# Altium PCB AB1000_RB_V6_fin.PcbDoc
Units mm, origin at the board's own origin, x right, y up, seen from the top; angles counter-clockwise.
Board outline 58.5 x 26.6 mm, 2 copper layers (Top Layer, Bottom Layer), stack 1.581 mm thick; 51 components, 40 nets, 148 pads, 114 vias.
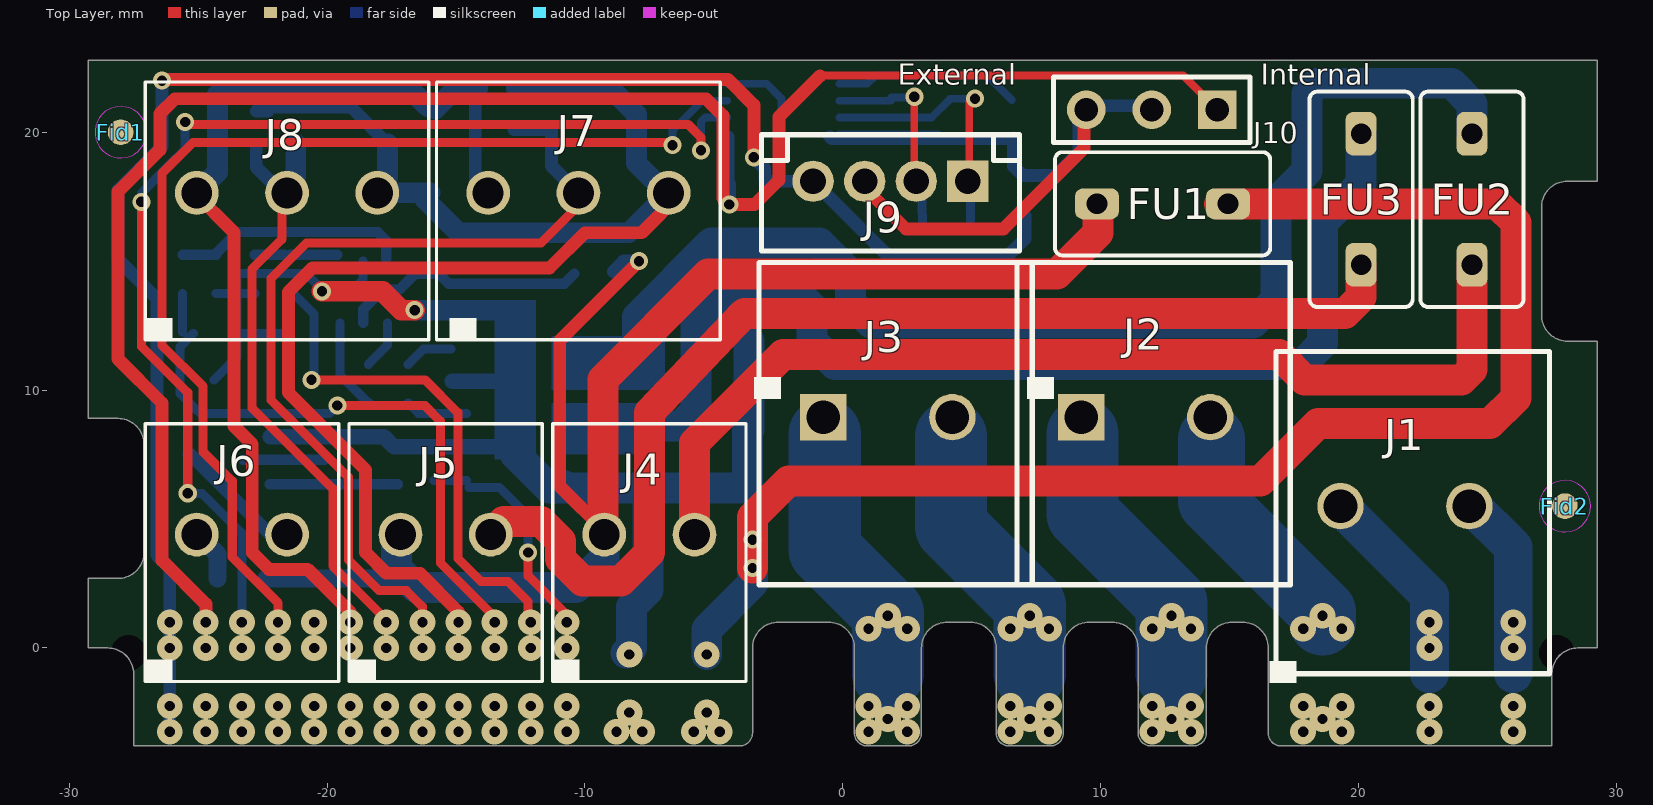
[diagram p0: Top Layer view]
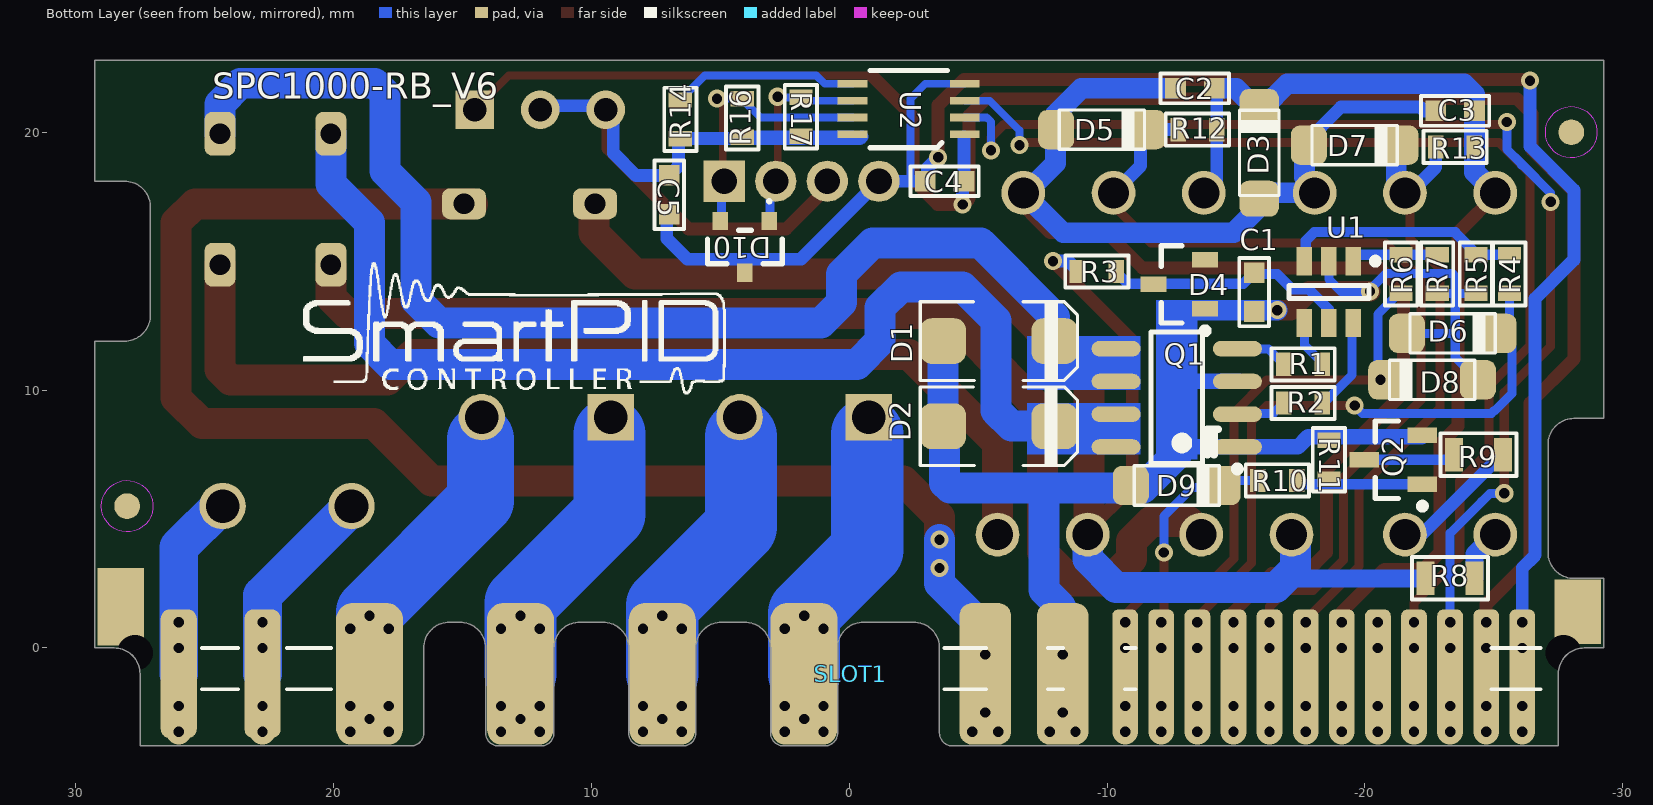
[diagram p1: Bottom Layer view, seen from below]

## Layer stack, top to bottom
Top Solder: solder mask 0.0102, Solder Resist, Dk 3.5
Top Layer: signal copper 0.0356
Dielectric 1: dielectric 1.51, FR-4, Dk 4.8
Bottom Layer: signal copper 0.0356
Bottom Solder: solder mask 0.0102, Solder Resist, Dk 3.5

## Board outline
-27.5,-3.8 -4,-3.8 ccw(c-4,-3.3) -3.5,-3.3 -3.5,0 cw(c-2.5,0) -2.5,1 -0.55,1 cw(c-0.55,0) 0.45,0 0.45,-3.3 ccw(c0.95,-3.3) 0.95,-3.8 2.55,-3.8 ccw(c2.55,-3.3) 3.05,-3.3 3.05,0 cw(c4.05,0) 4.05,1 4.95,1 cw(c4.95,0) 5.95,0 5.95,-3.3 ccw(c6.45,-3.3) 6.45,-3.8 8.05,-3.8 ccw(c8.05,-3.3) 8.55,-3.3 8.55,0 cw(c9.55,0) 9.55,1 10.45,1 cw(c10.45,0) 11.45,0 11.45,-3.3 ccw(c11.95,-3.3) 11.95,-3.8 13.6,-3.8 ccw(c13.6,-3.3) 14.1,-3.3 14.1,0 cw(c15.1,0) 15.1,1 15.5,1 cw(c15.5,0) 16.5,0 16.5,-3.3 ccw(c17,-3.3) 17,-3.8 27.5,-3.8 27.5,-1 cw(c28.5,-1) 28.5,0 29.25,0 29.25,11.9 28.1,11.9 cw(c28.1,12.9) 27.1,12.9 27.1,17.1 cw(c28.1,17.1) 28.1,18.1 29.25,18.1 29.25,22.8 -29.25,22.8 -29.25,8.9 -28.1,8.9 cw(c-28.1,7.9) -27.1,7.9 -27.1,3.7 cw(c-28.1,3.7) -28.1,2.7 -29.25,2.7 -29.25,0 -28.5,0 cw(c-28.5,-1) -27.5,-1

## Design rules (kind name [scope] priority, off if disabled: settings)
Clearance [All] p1: gap=0.25
ComponentClearance ComponentClearance_1 [All vs InComponent('SLOT1') or InComponent('J1','J2','Fid1')] p1: gap=0 collisioncheckmode=3 verticalgap=0 showdistances=TRUE
ComponentClearance [All] p2: gap=0.254 collisioncheckmode=3 verticalgap=0.254 showdistances=FALSE
PolygonConnect [All] p1: connectstyle=Relief reliefconductorwidth=0.254 reliefentries=4 polygonreliefangle="90 Angle" airgapwidth=0.254
RoomDefinition AB1000_RB_V6_fin [InComponentClass('AB1000_RB_V6_fin')] p1: confinementstyle=ConfineIn formatcopy=TRUE lockcomponents=FALSE outline -82.245,-52.527 -31.445,-52.527 -31.445,-27.127 -82.245,-27.127
RoutingVias [All] p1: holewidth=0.5 width=0.8 viastyle="Through Hole" minholewidth=0.4 minwidth=0.7 maxholewidth=0.8 maxwidth=1.5
SolderMaskExpansion [All] p1: expansion=0.102
Width [All] p1: maxlimit=5 minlimit=0.3 preferedwidth=0.5
29 further rules are at their usual default settings.

## Components (designator, comment, footprint, x,y, rotation, side; value= is the part's Value field where it differs from the comment)
C1 "10uF 6.3V" C0603_IR -15.7,13.8 r270 bottom
C2 "1uF" C0603_IR -13.4,21.7 r0 bottom
C3 "1uF" C0603_IR -23.495,20.828 r0 bottom
C4 "0.1uF" C0603_IR -3.7,18.1 r180 bottom
C5 "0.1uF" C0603_IR 6.975,17.575 r270 bottom
D1 "1SMA5920BT3" "DO-214AC (SMA)" -5.8,11.9 r180 bottom
D2 "1SMA5920BT3" "DO-214AC (SMA)" -5.8,8.6 r180 bottom
D3 "3.3V" SOD80/MLL34 -15.9,19.2 r90 bottom
D4 "BZX84-C5V1" SOT23_L -12.8,14.1 r0 bottom
D5 "5.5V" SOD80/MLL34 -9.8,20.1 r180 bottom
D6 "3.3V" SOD80/MLL34 -23.4,12.2 r180 bottom
D7 "5.5V" SOD80/MLL34 -19.6,19.5 r180 bottom
D8 "3.3V" SOD80/MLL34 -22.6,10.4 r0 bottom
D9 "3.3V" SOD80/MLL34 -12.7,6.3 r180 bottom
D10 "BAT54A" NXP-SOT23-3_V 4.05,15.55 r180 bottom
Fid1 "Fiducial mark" Fiducial -28,20 r90 top
Fid2 "Fiducial mark" Fiducial 28,5.5 r90 top
FU1 "Fuse 2A" fuseRFTQ 12.4,17.225 r270 top
FU2 "Fuse 2A" fuseRFTQ 24.4,17.4 r0 top
FU3 "Fuse 2A" fuseRFTQ 20.1,17.4 r0 top
J1 "691201720002S" 691201720002S#1 21.8,5.5 r0 top
J2 "691201720002S" 691201720002S#2 11.75,8.95 r0 top
J3 "691201720002S" 691201720002S#2 1.75,8.95 r0 top
J4 "691221120002" 691221120002 -7.5,4.4 r0 top
J5 "691221120002" 691221120002 -15.4,4.4 r0 top
J6 "691221120002" 691221120002 -23.3,4.4 r0 top
J7 "691221120003" 691221120003 -10.25,17.65 r0 top
J8 "691221120003" 691221120003 -21.55,17.65 r0 top
J9 "B4B-PH" CON4_P2.0 1.85,18.1 r180 top
J10 "Header 3" HDR1X3 14.525,20.875 r180 top
Q1 "IRF7313" 8S1_L -12.7,9.7 r0 bottom
Q2 "BC817-40" SOT-23A_N -21.1,7.3 r0 bottom
R1 "10" R0603_IR -17.6,11 r0 bottom
R2 "10" R0603_IR -17.6,9.5 r0 bottom
R3 "1k" R0603_IR -9.6,14.6 r180 bottom
R4 "1k" R0603_IR -25.6,14.5 r270 bottom
R5 "51k" R0603_IR -24.3,14.5 r90 bottom
R6 "1k" R0603_IR -21.4,14.5 r270 bottom
R7 "51k" R0603_IR -22.8,14.5 r90 bottom
R8 "33" R0805_IR -23.3,2.7 r180 bottom
R9 "33" R0805_IR -24.4,7.5 r180 bottom
R10 "5k1 1%" R0603_IR -16.6,6.5 r0 bottom
R11 "51k" R0603_IR -18.6,7.3 r270 bottom
R12 "5k1 1%" R0603_IR -13.5,20.1 r180 bottom
R13 "5k1 1%" R0603_IR -23.495,19.431 r180 bottom
R14 "10k" R0603_IR 6.55,20.5 r90 bottom
R16 "1K" R0603_IR 4.15,20.55 r90 bottom
R17 "1K" R0603_IR 1.875,20.6 r270 bottom
SLOT1 "slot_rear_panel_1" REAR_PANEL_MAIN_SLOT_NCOv2 0,0 r0 top locked
U1 "74LVC2G34" SC70(SOT23-6) -18.6,13.8 r90 bottom
U2 "P82B96DGKR" TSSOP-8_P0.65MM_3.1X3.1MM -2.3,20.9 r0 bottom

## Footprints (in the part's own frame and the unit in brackets; to place one, negate y for a bottom-side part, rotate by r counter-clockwise, add the part's x,y. Pads: shape width x height; smd on the part's side, far side on the other; paste and mask are expansions set on the pad)
8S1_L [mm] "SOIC, 8-Leads, Body 4.9x3.9mm, Pitch 1.27mm, IPC High Density"
  oval 1.9x0.6 smd: 1(-2.35,1.905) 2(-2.35,0.635) 3(-2.35,-0.635) 4(-2.35,-1.905) 5(2.35,-1.905) 6(2.35,-0.635) 7(2.35,0.635) 8(2.35,1.905)
  silkscreen extent -2.47,-2.55 1,2.88, body extent -2.92,-2.45 2.86,2.45, height 1.45
691201720002S#1 [mm] "Serie 201S - 5.00 mm _ 2 pins"
  round 1.8 hole 1.3: 1(-2.5,0) 2(2.5,0)
  silkscreen extent -5,-6.5 5.6,6, body extent -5,-6.55 5.6,5.95, height 12.1
691201720002S#2 [mm] "Serie 201S - 5.00 mm _ 2 pins"
  rect 1.8x1.8 hole 1.3: 1(-2.5,0)
  round 1.8 hole 1.3: 2(2.5,0)
  silkscreen extent -5,-6.5 5.6,6, body extent -5,-6.55 5.6,5.95, height 12.1
691221120002 [mm] "3,50mm - modular - green - 55° wire entry - Cage clamp - 02p"
  round 1.7 hole 1.2: 1(-1.75,0) 2(1.75,0)
  silkscreen extent -3.75,-5.7 3.75,4.3, body extent -3.75,-5.7 3.75,4.3, height 9.51
691221120003 [mm] "3,50mm - modular - green - 55° wire entry - Cage clamp - 03p"
  round 1.7 hole 1.2: 1(-3.5,0) 2(0,0) 3(3.5,0)
  silkscreen extent -5.5,-5.7 5.5,4.3, body extent -5.5,-5.7 5.5,4.3, height 9.51
C0603_IR [mm]
  rect 0.8x0.8 smd: 1(0.75,0) 2(-0.75,0)
  silkscreen extent -1.33,-0.58 1.33,0.58, body extent -0.8,-0.4 0.8,0.4, height 0.8
CON4_P2.0 [mm] "JST connector"
  rect 1.6x1.6 hole 1: 1(-3,0)
  round 1.6 hole 1: 2(-1,0) 3(1,0) 4(3,0)
  silkscreen extent -5,-1.8 5,2.7, body extent -4.95,-1.74 4.95,2.76, height 6
"DO-214AC (SMA)" [mil] "DO-214-AC/SMA; 2 C-Bend Leads; Body 5 x 2.7 mm, inc. leads (LxW)"
  rrect50% 70x70 smd: 1(-85,0) 2(85,0)
  silkscreen extent -120,-60 120,60, body extent -98,-53 98,53, height 85
Fiducial [mm]
  round 1 smd far side paste-10 mask+0.5: 0(0,0)
  round 1 smd paste-10 mask+0.5: 0(0,0)
  Keep-Out Layer circle w0.01: c0,0 r1
fuseRFTQ [mm]
  rrect50% 1.2x1.7 hole 0.8: 1(0,-2.54) 2(0,2.54)
  silkscreen extent -2,-4.18 2,4.18, body extent -2,-4.17 2,4.18, height 7.7
HDR1X3 [mm] "Connector; Header; 3 Position"
  rect 1.5x1.5 hole 0.9: 1(0,0)
  round 1.5 hole 0.9: 2(2.54,0) 3(5.08,0)
  silkscreen extent -1.27,-1.27 6.35,1.27, body extent -1.24,-1.2 6.38,1.34, height 8.55
NXP-SOT23-3_V [mm] "SOT23, 3-Leads, Body 1.3x2.9mm, Pitch 0.95mm"
  rect 0.6x0.7 smd paste-0.05: 1(0.95,1) 2(-0.95,1) 3(0,-1)
  silkscreen extent -1.45,-0.65 1.45,1.79, body extent -1.45,-0.65 1.45,0.65, height 1.1
R0603_IR [mm]
  rect 0.6x0.9 smd: 1(0.75,0) 2(-0.75,0)
  silkscreen extent -1.22,-0.63 1.22,0.63, body extent -0.8,-0.4 0.8,0.4, height 0.4
R0805_IR [mm]
  rect 0.7x1.3 smd: 1(0.95,0) 2(-0.95,0)
  silkscreen extent -1.48,-0.82 1.48,0.82, body extent -1,-0.62 1,0.63, height 0.5
REAR_PANEL_MAIN_SLOT_NCOv2 [mm]
  rrect50% 1x5 smd far side paste-3: 1(-24.7,-1) 2(-23.3,-1) 3(-21.9,-1) 4(-20.5,-1) 5(-19.1,-1) 6(-17.7,-1) 7(-16.3,-1) 8(-14.9,-1) 9(-13.5,-1) 10(-12.1,-1) 11(-10.7,-1) R(-26.1,-1)
  rrect50% 2x5.5 smd far side paste-3: 12(-8.275,-1) 13(-5.275,-1)
  rrect50% 2.6x5.5 smd far side paste-3: 14(1.75,-1) 15(7.25,-1) 16(12.75,-1) 17(18.6,-1)
  rrect50% 1.4x5 smd far side paste-3: 18(22.75,-1) 19(26,-1)
  body extent -26.6,-3.7 26.7,1.7, height 0.1
SC70(SOT23-6) [mm] "SOT-23, 6-Leads, Body 2.90x1.60mm, Pitch 0.95mm, IPC Medium Density"
  rect 1.1x0.6 smd: 1(1.2,-0.95) 2(1.2,0) 3(1.2,0.95) 4(-1.2,0.95) 5(-1.2,0) 6(-1.2,-0.95)
  silkscreen extent -0.25,-1.92 1.32,1.55, body extent -1.42,-1.46 1.42,1.46, height 1.1
SOD80/MLL34 [mil]
  rrect50% 55x60 smd: 1(-70,0) 2(70,0)
  silkscreen extent -65,-30 65,30, body extent -69,-28 69,27, height 55
SOT23_L [mm] "SOT23, 3-Leads, Body 2.9x1.3mm, Pitch 0.95mm, Lead Span 2.3mm, IPC High Density"
  rect 1x0.6 smd: 1(-1,0.95) 2(-1,-0.95) 3(1,0)
  silkscreen extent -1.12,-1.5 0.7,1.92, body extent -0.7,-1.5 0.7,1.5, height 1.1
SOT-23A_N [mm] "SOT23, 3-Leads, Body 2.9x1.3mm, Pitch 0.95mm, Lead Span 2.3mm, IPC Medium Density"
  rect 1.15x0.6 smd: 1(-1.125,0.95) 2(-1.125,-0.95) 3(1.125,0)
  silkscreen extent -1.25,-1.5 0.7,1.92, body extent -0.7,-1.5 0.7,1.5, height 1.09
TSSOP-8_P0.65MM_3.1X3.1MM [mm]
  rect 1.15x0.3 smd: 1(-2.175,0.975) 2(-2.175,0.325) 3(-2.175,-0.325) 4(-2.175,-0.975) 5(2.175,-0.975) 6(2.175,-0.325) 7(2.175,0.325) 8(2.175,0.975)
  silkscreen extent -1.5,-1.5 1.5,1.5, body extent -2.5,-1.55 2.5,1.55, height 1.11

## Part data
C1 C2 C3 C4 C5: library part CapSMD, "Capacitor"
D1 D2: library part 1SMA59xxBT3, "SMD-SMA 1.5W"
D3 D5 D6 D7 D8 D9: library part BZV55-SMD, "BZV55 SMD-SOD80C  0.5W"
D4: library part BZX84-C11, "Voltage Regulator Diode"
D10: library part CMP-0417-00002-1, "Schottky Barrier Diode, 30 V, 2 uA, -55 to 150 degC, 3-Pin SOT23, RoHS, Tape and Reel"
Fid1 Fid2: library part Fiducial, "Fiducial Mark"
FU1 FU2 FU3: library part "FUSE- RFTQ", "5mm 15A"
J1: "45deg Cable Entry with Rising Cage Clamp, Serie 201S - 5.00 mm"
J2 J3: "45deg  Cable Entry with Rising Cage Clamp, Serie 201S - 5.00 mm"
J4 J5 J6 J7 J8: "WR-TBL Terminal Blocks Serie 2211 - 3.50 mm"
J9: "4 Positions Header, Shrouded Connector 0.079\" (2.00mm) Through Hole Tin"
J10: "Header, 3-Pin"
Q1: "HEXFET Power MOSFET"
Q2: "NPN General Purpose Amplifier"
R1 R2 R3 R4 R5 R6 R7 R8 R9 R10 R11 R12 R13 R14: library part ResSMD, "Resistor"
R16 R17: library part R_SMD, "Resistor"
U1: "Triple Non-inverters"
U2: library part CMP-0314-00301-2, "Dual Bidirectional Bus Buffer, 2 Channel Width, 2.0 to 15.0 V, -40 to 85 degC, 8-pin MSOP (DGK), Green (RoHS & no Sb/Br)"

## Free pads (board coordinates)
  round 0.2 hole 1.4 unplated paste-3 mask-3: cu14(-27.7,-0.2) cu14(27.7,-0.2)
  rect 1.8x2.5 smd far side paste-3: SM(-28.25,1.4)
  rect 1.8x3 smd far side paste-3: SM(28.25,1.6)

## Via types
v1: diameter 1, hole 0.4, Top Layer to Bottom Layer, tented both sides, 96 vias
v2: diameter 0.7, hole 0.4, Top Layer to Bottom Layer, tented both sides, 18 vias

## Nets (pads, with @x,y where several pads share a name; then routed paths per layer and width w, separated by ;. In a path a pad name is that pad's centre, name@x,y a point inside that pad or via, vN(x,y) a via of type N, cw(c..) or ccw(c..) an arc to the next point about the centre after c; other vN are vias at no path point)
12V: FU1.2 SLOT1.13 | length 57.3
  Top Layer w1.2: v2(-3.5,3.1) v2(-3.5,4.2) -3.5,5.075 -2.1,6.475 16.2,6.475 18.425,8.7 25.1,8.7 26.1,9.7 26.1,16.5 25.375,17.225 FU1.2@14.6,17.225
  Bottom Layer w1.2: v1(-5.275,-0.25) -5.275,0.725 -3.5,2.5 v2(-3.5,3.1) v2(-3.5,4.2)
  other v1: -5.775,-3.25 -4.775,-3.25 -5.275,-2.5
AC1: J1.1 SLOT1.18 | length 8
  Bottom Layer w1.5: J1.1@19.3,5.6 J1.1 22.75,2.05 SLOT1.18
  other v1: 22.75,-3.25 22.75,-2.25 22.75,0 22.75,1
AC2: J1.2 SLOT1.19 | length 7.3
  Bottom Layer w1.5: J1.2@24.3,5.6 26,3.9 SLOT1.19
  other v1: 26,-3.25 26,-2.25 26,0 26,1
CFET1: D1.2 FU2.2 Q1.5 Q1.6 | length 45.6
  Bottom Layer w1.2: D1.2 -7.959,12.841 -5.1,15.7 -0.9,15.7 0.3,14.5 0.3,13.4 1.1,12.6 15.9,12.6 16.8,13.5 16.8,17.1 ; 16.8,17.3 18,18.5 18,21.5 18.4,21.9 23.6,21.9 24.4,21.1 FU2.2 FU2.2@24.4,19.9
CFET2: D2.2 FU3.2 Q1.7 Q1.8 | length 42
  Bottom Layer w1.2: D2.2 -6.3,8.6 -5.7,9.2 -5.7,12.7 -4.4,14 -2,14 -1.2,13.2 -1.2,11.9 -0.3,11 17.8,11 18.6,11.8 18.6,16.5 20.1,18 FU3.2@20.1,20
D33V: C4.1 J10.1 SLOT1.1 U2.1 | length 73.4
  Top Layer w0.3: -0.85,22.2 13.2,22.2 J10.1@14.5,20.9
  Top Layer w0.5: v1(-24.7,1) -24.7,1.7 -26.4,3.4 -26.4,9.5 -28.1,11.2 -28.1,17.7 -26.482,19.318 -26.482,20.716 -25.898,21.3 -5.3,21.3 -4.65,20.65 -4.65,17.425 v2@-4.425,17.2 ; v2(-4.4,17.2) -3.425,17.2 -2.475,18.15 -2.475,20.6 -0.887,22.187 ; J10.1@14.337,20.613 J10.1@14.45,20.5
  Bottom Layer w0.5: C4.1@-4.475,18.075 -4.4,18 v2(-4.4,17.2) ; C4.1 U2.1@-4.45,19.825
  other v1: -24.7,-3.25 -24.7,-2.25 -24.7,0
F12V: FU1.1 J4.1 J5.1 R3.2 R8.2 | length 58.6
  Top Layer w0.5: J4.1@-9.2,4.4 -9.2,4.5 -10.975,6.275 -10.975,11.925 v2(-7.9,15)
  Top Layer w1.2: J4.1@-9.2,4.3 -9.25,4.35 J4.1 -9.2,4.4 -9.3,4.5 -9.3,10.419 -5.219,14.5 8.3,14.5 9.9,16.1 FU1.1@9.9,16.7
  Bottom Layer w0.5: R3.2@-8.9,14.6 -8.5,15 v2(-7.9,15)
  Bottom Layer w0.7: R8.2 -17.2,2.7 -17.05,2.85 -17,2.9
  Bottom Layer w1.2: J5.1@-17.3,4.3 -17.3,3.1 -17.05,2.85 -16.55,2.35 -10.35,2.35 -9.25,3.45 J4.1
GND: C1.1 D1.1 D2.1 D4.1 D6.1 D8.1 D9.1 Q1.1 Q1.3 Q2.2 R5.2 R7.2 R11.2 SLOT1.12 U1.2 | length 59
  Top Layer w0.8: v2(-20.193,13.828) -17.841,13.828 -17.113,13.1 v2(-16.6,13.1)
  Bottom Layer w0.35: D8.1 -23.5,11.278 -23.5,12.3 ; R5.2 -23.5,13.75 ; R7.2 -23.5,13.75 ; D6.1 -23.4,12.2 -23.5,12.3 ; v2@-20.2,13.8 -19.1,13.8 -18.6,14.3 U1.2 ; v2(-20.193,13.828) -20.193,13.894 -20.824,14.525 -22.026,14.525 -23.375,14.525 -23.5,14.4 -23.5,13.75 ; -23.5,12.3 -23.5,13.75
  Bottom Layer w0.6: Q2.2@-22.2,8.2 -17.8,8.2 -17.4,7.8 -16.4,7.8 ; -16.4,7.795 Q1.1 -12.7,7.795 -12.595,7.795 ; Q1.3@-15.15,10.335 Q1.3 -12.835,10.335
  Bottom Layer w0.8: v2(-16.6,13.1) -16.4,13.1 -16.407,13.093 -13.193,13.093 -12.6,12.5 -12.6,10.9
  Bottom Layer w1.2: -12.7,8.5 -12.7,7.795 -12.7,7.5 -11.4,6.2 D9.1@-10.922,6.2 ; D9.1@-10.822,6.3 D9.1@-10.922,6.2 ; SLOT1.12@-8.4,-0.2 -8.2,0 -8.2,1.6 -7.55,2.25 -7.55,6.093 -7.657,6.2 ; D2.1@-3.7,8.6 -3.7,6.4 -3.9,6.2 -7.657,6.2 ; D2.1@-3.641,8.459 D2.1 D1.1 ; D9.1@-10.922,6.2 -7.657,6.2
  other v1: -8.775,-3.25 -7.775,-3.25 -8.275,-2.5 -8.275,-0.25
GND_D33V: C4.2 C5.1 D10.3 J9.4 SLOT1.R U2.4 | length 71.3
  Top Layer w0.5: v2(-26.4,22) -26.35,22.05 -4.45,22.05 -3.45,21.05 v2@-3.45,19.05
  Bottom Layer w0.3: U2.4 -2.95,21.875 -2.375,21.3 -2.375,18.1
  Bottom Layer w0.5: v2@-26.4,21.7 -26.4,19.453 -28.1,17.753 -28.1,15.05 -26.6,13.55 -26.6,3.6 -26.1,3.1 v1(-26.1,1) v1(-26.1,0) SLOT1.R v1(-26.1,-2.25) v1(-26.1,-3.25) ; v2(-3.45,19.025) -3.025,18.6 -3.025,18.175 C4.2 -2.375,18.1 J9.4@-1.375,18.1 ; J9.4 1.875,15.075 4.05,15.075 ; D10.3 4.05,15.075 ; C5.1@7.075,16.75 7.075,15.875 6.275,15.075 4.05,15.075
GROVE_SCK: SLOT1.2 U2.2 | length 45.3
  Top Layer w0.35: v2@-27.2,17.445 v2(-27.2,17.3) -27.2,11.7 -25.4,9.9 v2(-25.4,6) ; v2(-25.5,20.4) -25.4,20.3 -6,20.3 -5.5,19.8 v2(-5.5,19.3)
  Bottom Layer w0.3: v2(-5.5,19.3) -5.5,20.4 -5.325,20.575 U2.2
  Bottom Layer w0.35: v2(-27.2,17.3) -27.2,17.643 -26.075,18.768 ; -26.075,18.725 -26.075,18.768 ; v2@-25.5,6 v2(-25.4,6) -24.855,6 -24.53,5.675 -24.522,5.675 -23.3,4.453 v1(-23.3,1) ; v2(-25.5,20.4) -25.5,19.343 -26.075,18.768
  other v1: -23.3,-3.25 -23.3,-2.25 -23.3,0
GROVE_SDA: SLOT1.3 U2.3 | length 42.8
  Top Layer w0.35: v1(-21.9,1) -21.9,1.745 -23.675,3.52 -23.675,6.475 -24.8,7.6 -24.8,10.149 -26.4,11.749 -26.4,18.4 -25.2,19.6 -6.7,19.6 v2(-6.6,19.5)
  Bottom Layer w0.3: v2(-6.6,19.5) -6.6,20.078 -5.453,21.225 U2.3
  other v1: -21.9,-3.25 -21.9,-2.25 -21.9,0
NetD10_1: D10.1 J9.2 R17.2 U2.6 | length 7.8
  Top Layer w0.3: J9.2@2.7,18.25 2.775,18.325 v2(2.775,21.375) ; J9.2@3,17.55 J9.2@3,18.1
  Bottom Layer w0.3: U2.6 1.85,21.225 R17.2@1.875,21.25 ; R17.2 2.65,21.35 v2@2.75,21.45
  Bottom Layer w0.35: J9.2@3.075,17.725 3.05,17.7 D10.1@3.083,16.546
NetD10_2: D10.2 J9.1 R16.1 U2.7 | length 10.8
  Top Layer w0.3: J9.1@4.9,17.9 4.9,21.2 5,21.3 v2(5.125,21.3) ; J9.1@4.925,17.675 4.975,17.625 J9.1@4.95,17.625
  Bottom Layer w0.3: U2.7 3.45,20.575 R16.1@4.125,21.25 ; R16.1 5.15,21.3 v2@5.25,21.4 ; J9.1@5.25,17.825 J9.1@5.4,17.675
  Bottom Layer w0.35: D10.2@4.95,16.6 4.95,17.75 J9.1@5.025,17.825
NetFU2_1: FU2.1 J4.2 | length 39.8
  Top Layer w1.2: J4.2 -5.75,7.95 -2.325,11.375 16.925,11.375 17.9,10.4 24,10.4 24.4,10.8 FU2.1@24.4,14.9
NetFU3_1: FU3.1 J5.2 | length 44.5
  Top Layer w1.2: J5.2@-13.75,4.4 J5.2 -13.15,4.9 -11.703,4.9 -10.95,4.147 -10.95,3.45 -10.1,2.6 -8.6,2.6 -7.5,3.7 -7.5,9.124 -3.816,12.975 19.475,12.975 20.1,13.6 FU3.1
NetJ6_1: J6.1 R8.1 | length 2.5
  Bottom Layer w0.4: J6.1@-25.35,4.35 J6.1@-25.2,4.5 ; J6.1@-25.25,4.4 J6.1@-25.1,4.4
  Bottom Layer w0.7: J6.1@-25.1,4.4 -25,4.4 -24.25,3.65 R8.1
NetJ6_2: J6.2 R9.1 | length 5
  Bottom Layer w0.5: R9.1 -25.3,7.5 -22.2,4.4 J6.2@-21.6,4.4
NetQ1_2: Q1.2 R2.1 | length 2.4
  Bottom Layer w0.35: R2.1 -16.45,9.1 Q1.2@-14.6,9.1
NetQ1_4: Q1.4 R1.1 | length 1.9
  Bottom Layer w0.35: R1.1 -16.25,11.6 Q1.4@-15.2,11.6
NetQ2_1: Q2.1 R10.2 R11.1 | length 5
  Bottom Layer w0.4: Q2.1 R10.2@-17.25,6.35
NetQ2_3: Q2.3 R9.2 | length 3.2
  Bottom Layer w0.4: R9.2@-23.25,7.3 Q2.3@-20.1,7.3
NetR1_2: R1.2 U1.4 | length 1.9
  Bottom Layer w0.35: R1.2@-18.4,11 -17.65,11.75 U1.4
NetR2_2: R2.2 U1.6 | length 3.6
  Bottom Layer w0.35: U1.6@-19.5,12.6 -19.5,10.6 -18.4,9.5 R2.2
NetR4_2: R4.2 R5.1 U1.3 | length 9
  Bottom Layer w0.4: R4.2 R5.1@-24.45,15.25 ; R5.1 -24.3,15.3 -23.5,16.1 ; -23.5,16.129 -18.029,16.129 -17.7,15.8 U1.3@-17.7,15.1
NetR6_2: R6.2 R7.1 U1.1 | length 3
  Bottom Layer w0.4: R7.1 R6.2@-21.65,15.25 ; R6.2 U1.1@-19.6,15.25
NetR14_1: R14.1 U2.5 | length 7.3
  Bottom Layer w0.3: U2.5 0.95,21.875 1.275,22.2 5.6,22.2 ; 5.5,22.2 5.6,22.2 ; R14.1 5.6,22.2
REL1_1: J2.1 SLOT1.16 | length 10.7
  Bottom Layer w2.8: J2.1@9.3,8.3 9.3,5.2 12.75,1.75 v1(12.75,1.25) SLOT1.16
  other v1: 12,-3.25 13.5,-3.25 12.75,-2.75 12,-2.25 13.5,-2.25 12,0.75 13.5,0.75
REL1_2: J2.2 SLOT1.17 | length 8.9
  Bottom Layer w2.6: J2.2@14.3,8.1 14.3,5.7 18.6,1.4 SLOT1.17@18.6,1
  other v1: 17.85,-3.25 19.35,-3.25 18.6,-2.75 17.85,-2.25 19.35,-2.25 17.85,0.75 19.35,0.75 18.6,1.25
REL2_1: J3.1 SLOT1.14 | length 10.3
  Bottom Layer w2.8: J3.1@-0.7,8.3 -0.7,3.8 1.75,1.35 v1(1.75,1.25) SLOT1.14
  other v1: 1,-3.25 2.5,-3.25 1.75,-2.75 1,-2.25 2.5,-2.25 1,0.75 2.5,0.75
REL2_2: J3.2 SLOT1.15 | length 10.5
  Bottom Layer w2.8: J3.2@4.2,8.2 4.2,4.7 7.25,1.65 v1(7.25,1.25) SLOT1.15
  other v1: 6.5,-3.25 8,-3.25 7.25,-2.75 6.5,-2.25 8,-2.25 6.5,0.75 8,0.75
RES1: SLOT1.4
  other v1: -20.5,-3.25 -20.5,-2.25 -20.5,0 -20.5,1
S_GND: C2.1 C3.1 D3.1 D5.1 D7.1 J7.3 J8.3 SLOT1.8 | length 62.8
  Top Layer w0.5: v1(-14.9,1) -14.9,1.4 -16.398,2.898 -17.698,2.898 -18.5,3.7 -18.5,5.6 -18.5,6.903 -21.5,9.903 -21.5,13.8 -20.568,14.732 -11.368,14.732 -10,16.1 -7.8,16.1 J7.3@-6.25,17.65
  Bottom Layer w0.5: C3.1 -22.289,20.828 -22.139,20.978 -19.073,20.978 D7.1@-17.653,19.558
  Bottom Layer w0.8: D7.1@-17.653,19.558 -17.653,18.247 -18.25,17.65 J8.3 -15.999,17.65 -16.2,17.449 -16.2,17.4 -14.9,16.1 -8.3,16.1 -6.8,17.6 -8,18.8 -8,20.7 -9,21.7 C2.1
  other v1: -14.9,-3.25 -14.9,-2.25 -14.9,0
S_IN1: D7.2 J8.2 R13.2 SLOT1.6 | length 23.5
  Top Layer w0.35: J8.2@-21.75,17.65 -21.75,15.85 -22.9,14.7 -22.9,9.3 -19.775,6.175 -19.775,3.172 -17.703,1.1 v1@-17.7,1.1
  Bottom Layer w0.5: R13.2 -22.745,18.645 J8.2@-21.75,17.65
  Bottom Layer w0.8: J8.2@-21.75,17.65 -21.209,18.191 D7.2@-21.209,19.558
  other v1: -17.7,-3.25 -17.7,-2.25 -17.7,0 -17.7,1
S_IN2: D5.2 J7.2 R12.2 SLOT1.7 | length 34.7
  Top Layer w0.35: -20.8,15.7 -20.803,15.697 ; v1@-16.4,1 -16.3,1.1 -16.3,1.6 -16.923,2.223 -17.978,2.223 -19.175,3.42 -19.175,6.624 -22.175,9.624 -22.175,14.325 -20.803,15.697 ; J7.2@-9.75,17.65 -11.703,15.697 -20.803,15.697
  Bottom Layer w0.35: D5.2@-11.3,20.1 D5.2@-11.3,20.2
  Bottom Layer w0.5: R12.2 -11.3,20.1 -11.3,18.7 J7.2
  other v1: -16.3,-3.25 -16.3,-2.25 -16.3,0 -16.3,1
S_VCC: C2.2 C3.2 D3.2 J7.1 J8.1 R12.1 R13.1 SLOT1.5 | length 39.5
  Top Layer w0.5: J8.1@-25.2,17.7 -23.6,16.1 -23.6,8.6 -22.9,7.9 -22.9,3.7 -22.25,3.05 -20.75,3.05 -19.1,1.4 v1@-19.1,1.1
  Bottom Layer w0.5: C2.2@-14.2,21.7 -14.25,21.65 R12.1 -14.25,18.05 J7.1@-13.7,17.5
  Bottom Layer w0.8: J8.1@-25.25,17.65 J8.1 -24.245,18.455 C3.2 -24.245,21.475 -23.838,21.882 -16.982,21.882 D3.2@-16.1,21 ; D3.2@-15.8,20.9 -15,21.7 -14.2,21.7 C2.2
  other v1: -19.1,-3.25 -19.1,-2.25 -19.1,0 -19.1,1
UFET1: D6.2 R4.1 SLOT1.9 | length 23.5
  Top Layer w0.35: v2(-19.6,9.4) -16.2,9.4 -15.6,8.8 -15.6,3.3 v1@-13.4,1.1
  Bottom Layer w0.35: D6.2@-25.6,12.25 R4.1 ; D6.2 -25.7,11.678 -25.7,9.865 -25.048,9.213 -25.013,9.213 -24.9,9.1 -19.9,9.1 v2(-19.6,9.4)
  other v1: -13.5,-3.25 -13.5,-2.25 -13.5,0 -13.5,1
UFET2: D8.2 R6.1 SLOT1.10 | length 19.8
  Top Layer w0.35: v2(-20.6,10.4) -16.2,10.4 -14.925,9.125 -14.925,3.473 -14.026,2.575 -12.975,2.575 -12.2,1.8 v1@-12.2,1.1
  Bottom Layer w0.35: R6.1 -21.315,13.75 -20.498,12.933 -20.498,11.465 -20.5,11.464 D8.2@-20.5,10.3
  other v1: -12.1,-3.25 -12.1,-2.25 -12.1,0 -12.1,1
UFET_5V: C1.2 D4.3 R3.1 U1.5 | length 9.4
  Bottom Layer w0.4: U1.5 -18.6,13.136 -17.836,13.9 -17.2,13.9 -16.6,14.5 C1.2@-15.9,14.5 ; C1.2 -15.275,14.125 -10.8,14.125 R3.1@-10.4,14.525
USSR: D9.2 R10.1 SLOT1.11 | length 8.9
  Top Layer w0.35: v2(-12.2,3.7) -12.2,3 -12.2,2.8 -10.6,1.2 v1@-10.6,1
  Bottom Layer w0.35: R10.1 D9.2@-14.6,6.5 ; D9.2@-14.493,6.228 -13.328,6.228 -12.2,5.1 v2(-12.2,3.7) v2@-12.2,3.6
  other v1: -10.7,-3.25 -10.7,-2.25 -10.7,0 -10.7,1
V_GR: C5.2 J9.3 J10.2 J10.3 R14.2 R16.2 R17.1 U2.8 | length 31.3
  Top Layer w0.5: J9.3@1,17.7 2.45,16.25 6.225,16.25 9.35,19.375 J10.3@9.35,20.575
  Bottom Layer w0.3: U2.8 3.7,19.925 3.875,19.75 R16.2@3.95,19.675
  Bottom Layer w0.5: U2.8@-0.5,19.825 -0.425,19.75 3.875,19.75 R14.2 ; R14.2@6.625,19.775 6.625,18.675 C5.2 8.275,18.325 9.15,19.2 9.15,20.575 9.6,21.025 J10.2@12,21.025 ; J10.3@9.425,20.9 J10.3@9.45,20.875
pads on no net: D4.2 Fid1.0 Fid2.0

## Other copper
Bottom Layer:
  rectangle net CFET2: -11.3,7.5 -6.9,9.5
  rectangle net CFET1: -11.3,10 -6.9,12.1
  rectangle net GND: -13.5,7.3 -11.9,13.5

## Silkscreen, mask and mechanical layers (free items; w line width, h text height)
Top Overlay:
  rectangle: -3.45,9.65 -2.4,10.5
  rectangle: 7.15,9.65 8.2,10.5
  rectangle: 16.55,-1.35 17.6,-0.5
  rectangle: -11.25,-1.3 -10.2,-0.45
  rectangle: -19.15,-1.3 -18.1,-0.45
  rectangle: -27.05,-1.3 -26,-0.45
  rectangle: -15.25,11.95 -14.2,12.8
  rectangle: -27.05,11.95 -26,12.8
  text "External" at 2.125,21.85 h0.8
  text "Internal" at 16.2,21.85 h0.8
Bottom Overlay:
  drawing of 23 lines, arcs and shapes, not listed
  text "SPC1000-RB_V6" at 24.7,21.3 h1
Mechanical 8:
  lines w0.1: -29.25,0 -29.25,2.7 -28.1,2.7 ccw(c-28.1,3.7) -27.1,3.7 -27.1,7.9 ccw(c-28.1,7.9) -28.1,8.9 -29.009,8.9 -29.25,8.9 -29.25,22.8 29.25,22.8 29.25,18.1 28.1,18.1 ccw(c28.1,17.1) 27.1,17.1 27.1,12.9 ccw(c28.1,12.9) 28.1,11.9 29.25,11.9 29.25,0 28.5,0 ccw(c28.5,-1) 27.5,-1 27.5,-3.8 17,-3.8 cw(c17,-3.3) 16.5,-3.3 16.5,0 ccw(c15.5,0) 15.5,1 15.1,1 ccw(c15.1,0) 14.1,0 14.1,-3.3 cw(c13.6,-3.3) 13.6,-3.8 11.95,-3.8 cw(c11.95,-3.3) 11.45,-3.3 11.45,0 ccw(c10.45,0) 10.45,1 9.55,1 ccw(c9.55,0) 8.55,0 8.55,-3.3 cw(c8.05,-3.3) 8.05,-3.8 6.45,-3.8 cw(c6.45,-3.3) 5.95,-3.3 5.95,0 ccw(c4.95,0) 4.95,1 4.05,1 ccw(c4.05,0) 3.05,0 3.05,-3.3 cw(c2.55,-3.3) 2.55,-3.8 0.95,-3.8 cw(c0.95,-3.3) 0.45,-3.3 0.45,0 ccw(c-0.55,0) -0.55,1 -2.5,1 ccw(c-2.5,0) -3.5,0 -3.5,-3.3 cw(c-4,-3.3) -4,-3.8 -27.5,-3.8 -27.5,-1 ccw(c-28.5,-1) -28.5,0 -29.25,0
Mechanical 9:
  lines w0.15: -27.5,-4.4 27.5,-4.4 ; -27.5,0 27.5,0 ; -26.5,-2 -26.5,0 ; -8.25,-2.25 -8.25,1 ; -5.25,-2.25 -5.25,1.25 ; 0,-0.85 0,0.4 ; 1.75,-1 1.75,1.5 ; 7.25,-1 7.25,1.5 ; 12.75,-1 12.75,1.5 ; 16.25,-1 16.25,1.5 ; 26.5,-2 26.5,0 ; -27,-1.6 -27,-3.8 27,-3.8 27,-1.6 ; -27,-1.6 27,-1.6 ; -27,-1.6 -27,22.4 27,22.4 27,-1.6 ; -27.5,-2 27.5,-2 27.5,22.8 -27.5,22.8 -27.5,-2
Mechanical 13:
  lines w0.1: -29.25,3.1 -27.5,3.1 ; -29.25,8.5 -27.5,8.5 ; 27.5,12.3 29.25,12.3 ; 27.5,17.7 29.25,17.7
  lines w0.15: -3.5,-3.5 -3.5,2.5 ; 16.3,-3.75 16.3,3.75